# Altium PCB 模型USB.PcbDoc
Units mil, origin at the board's own origin, x right, y up, seen from the top; angles counter-clockwise.
Board outline 640 x 455 mil, 2 copper layers (Top Layer, Bottom Layer); 4 components, 4 nets, 30 pads, 2 vias.
Unrouted connection lines stored in the file: 3.
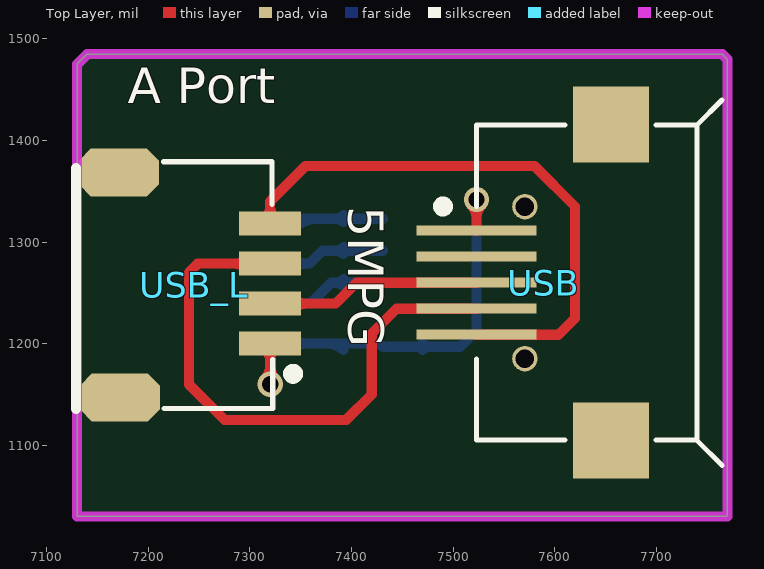
[diagram p0: Top Layer view]
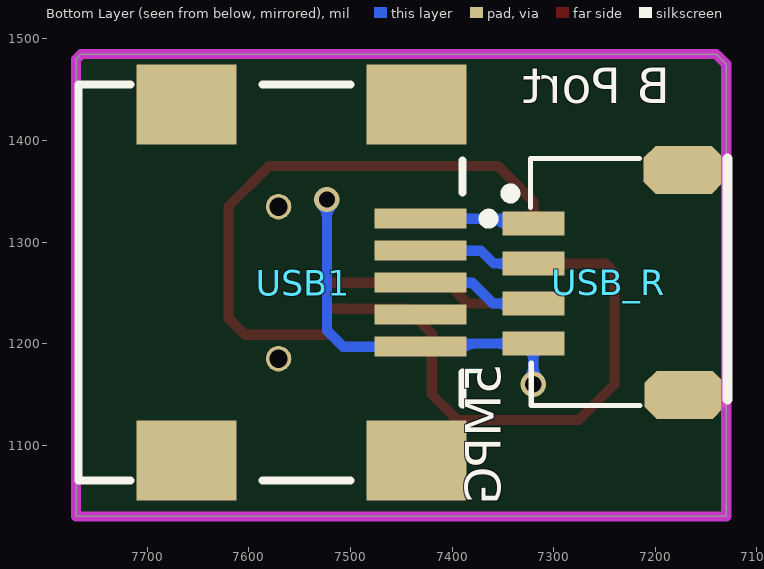
[diagram p1: Bottom Layer view, seen from below]

## Layer stack, top to bottom
Top Layer: signal copper 1.4
Dielectric: dielectric 12.6, FR-4, Dk 4.8
Bottom Layer: signal copper 1.4

## Board outline
7130,1030 7770,1030 7770,1480 7765,1485 7140,1485 7130,1475

## Design rules (kind name [scope] priority, off if disabled: settings)
Clearance [All] p1: gap=10
PolygonConnect [All] p1: connectstyle=Relief reliefconductorwidth=10 reliefentries=4 polygonreliefangle="90 Angle"
RoutingVias [All] p1: holewidth=28 width=50 viastyle="Through Hole" minholewidth=16 minwidth=25 maxholewidth=28 maxwidth=50
SilkscreenOverComponentPads [All] p1: minsilkscreentomaskgap=10
SolderMaskExpansion [All] p1: expansion=4
Width [All] p1: maxlimit=10 minlimit=10 preferedwidth=10
27 further rules are at their usual default settings.

## Components (designator, comment, footprint, x,y, rotation, side; value= is the part's Value field where it differs from the comment)
USB "USB-B(Mini)" Micro_USB 7740,1260 r0 top
USB1 "USB-B(Mini)" USB/SM0.8-6H5_M 7740,1260 r0 bottom
USB_L "Header 4" SH1.0-4P 7320,1200 r90 top
USB_R "Header 4" SH1.0-4P 7320,1318.11 r270 bottom

## Footprints (in the part's own frame and the unit in brackets; to place one, negate y for a bottom-side part, rotate by r counter-clockwise, add the part's x,y. Pads: shape width x height; smd on the part's side, far side on the other; paste and mask are expansions set on the pad)
Micro_USB [mm]
  rect 3x0.25 smd: 1(-5.508,-1.3) 2(-5.508,-0.65) 3(-5.508,0) 4(-5.508,0.65) 5(-5.508,1.3)
  round 0.635 hole 0.457 unplated: MH1(-4.3,1.9) MH2(-4.3,-1.9)
  rect 1.9x1.9 smd: ""(-2.15,-3.95) ""(-2.15,3.95)
  silkscreen extent -6.47,-4.57 0.63,4.57
SH1.0-4P [mm]
  rect 0.6x1.55 smd: 1(0,0) 2(1,0) 3(2,0) 4(3,0)
  oct 1.2x2 smd: A(-1.346,3.759) B(4.279,3.785)
  silkscreen extent -1.63,-0.7 4.55,4.85
USB/SM0.8-6H5_M [mm]
  rect 2.3x0.5 smd: 1(-7.85,-1.6) 2(-7.85,-0.8) 3(-7.85,0) 4(-7.85,0.8) 5(-7.85,1.6)
  rect 2.5x2 smd: 6(-7.75,4.45) 7(-1.996,4.45) 8(-7.75,-4.45) 9(-1.996,-4.45)
  silkscreen extent -9.67,-4.95 0.7,4.95

## Part data
USB USB1: library part USB5
USB_L USB_R: "Header, 4-Pin"

## Via types
v1: diameter 25, hole 16, Top Layer to Bottom Layer, 2 vias

## Nets (pads, with @x,y where several pads share a name; then routed paths per layer and width w, separated by ;. In a path a pad name is that pad's centre, name@x,y a point inside that pad or via, vN(x,y) a via of type N, cw(c..) or ccw(c..) an arc to the next point about the centre after c; other vN are vias at no path point)
5V: USB1.1 USB.1 USB_L.4 USB_R.1 | length 749.7
  Top Layer w10: USB_L.4@7315.18,1322.93 ccw(c7303.56,1334.55) 7320,1334.55 ccw(c7336.44,1334.55) USB_L.4@7324.82,1322.93 ; USB_L.4 7320,1340 7355,1375 7580,1375 7620,1335 7620,1225 7603.82,1208.82 USB.1
  Bottom Layer w10: USB_R.1 7324.88,1322.99 USB1.1 ; USB_R.1@7343.52,1313.29 cw(c7366.93,1289.88) 7366.93,1322.99 ; USB1.1@7392.09,1319.57 ccw(c7383.82,1311.3) 7383.82,1322.99 ccw(c7383.82,1334.68) USB1.1@7392.09,1326.42
DM: USB1.2 USB.2 USB_L.3 USB_R.2 | length 758
  Top Layer w10: USB_L.3@7296.48,1273.92 ccw(c7284.86,1262.3) 7284.86,1278.74 ccw(c7284.86,1295.18) USB_L.3@7296.48,1283.56 ; USB_L.3 7248.74,1278.74 7240,1270 7240,1160 7275,1125 7395,1125 7420,1150 7420,1210 7444.41,1234.41 USB.2
  Bottom Layer w10: USB_R.2 7358.74,1278.74 7371.5,1291.5 USB1.2 ; USB_R.2@7343.52,1273.92 cw(c7355.14,1262.3) 7355.14,1278.74 cw(c7355.14,1295.18) USB_R.2@7343.52,1283.56 ; USB1.2@7392.09,1288.07 ccw(c7383.82,1279.81) 7383.82,1291.5 ccw(c7383.82,1303.19) USB1.2@7392.09,1294.92
DP: USB1.3 USB.3 USB_L.2 USB_R.3 | length 401.2
  Top Layer w10: USB_L.2 7384.37,1239.37 7405,1260 USB.3 ; USB_L.2@7343.52,1234.55 cw(c7355.14,1222.93) 7355.14,1239.37 cw(c7355.14,1255.81) USB_L.2@7343.52,1244.19
  Bottom Layer w10: USB_R.3 7359.37,1239.37 7380,1260 USB1.3 ; USB_R.3@7343.52,1234.55 cw(c7355.14,1222.93) 7355.14,1239.37 cw(c7355.14,1255.81) USB_R.3@7343.52,1244.19 ; USB1.3@7392.09,1256.58 ccw(c7383.82,1248.31) 7383.82,1260 ccw(c7383.82,1271.69) USB1.3@7392.09,1263.43
GND: USB1.5 USB.5 USB_L.1 USB_R.4 | length 677.3
  Top Layer w10: v1@7314.7,1165.3 ccw(c7301.89,1178.11) 7320,1178.11 ccw(c7338.11,1178.11) v1@7325.3,1165.3 ; USB_L.1@7315.18,1195.18 cw(c7303.56,1183.56) 7320,1183.56 cw(c7336.44,1183.56) USB_L.1@7324.82,1195.18 ; v1(7320,1160) USB_L.1 ; v1@7517.85,1336.55 cw(c7505.04,1323.74) 7523.15,1323.74 cw(c7541.26,1323.74) v1@7528.45,1336.55 ; USB.5 v1(7523.15,1341.85)
  Bottom Layer w10: v1@7314.7,1165.3 ccw(c7301.89,1178.11) 7320,1178.11 ccw(c7338.11,1178.11) v1@7325.3,1165.3 ; USB_R.4@7315.18,1195.18 cw(c7303.56,1183.56) 7320,1183.56 cw(c7336.44,1183.56) USB_R.4@7324.82,1195.18 ; v1(7320,1160) USB_R.4 7427.95,1200 USB1.5 7507.01,1197.01 7523.15,1213.15 v1(7523.15,1341.85) ; USB_R.4@7343.52,1195.18 cw(c7355.14,1183.56) 7355.14,1200 cw(c7355.14,1216.44) USB_R.4@7343.52,1204.82 ; 7376.6,1200 cw(c7376.6,1178.1) USB1.5@7392.09,1193.59 ; USB1.5@7469.8,1193.59 cw(c7478.07,1185.32) 7478.07,1197.01 cw(c7478.07,1208.7) USB1.5@7469.8,1200.43 ; v1@7517.85,1336.55 cw(c7505.04,1323.74) 7523.15,1323.74 cw(c7541.26,1323.74) v1@7528.45,1336.55
pads on no net: USB1.4 USB1.6 USB1.7 USB1.8 USB1.9 USB. USB.4 USB.MH1 USB.MH2 USB_L.A USB_L.B USB_R.A USB_R.B

## Keep-outs
Keep-Out Layer:
  the board outline again, w10

## Silkscreen, mask and mechanical layers (free items; w line width, h text height)
Top Overlay:
  text "A Port" at 7180,1425 h60
  text "5MPG" at 7385,1335 h60 r270
Bottom Overlay:
  text "B Port" at 7185,1425 h60
  text "5MPG" at 7340,1180 h60 r270